# Altium PCB BLDC-Driver.PcbDoc
Units mm, origin at the board's own origin, x right, y up, seen from the top; angles counter-clockwise.
Board outline 62.48 x 53.29 mm, 2 copper layers (Top Layer, Bottom Layer), stack 0.264 mm thick; 59 components, 38 nets, 170 pads, 111 vias.
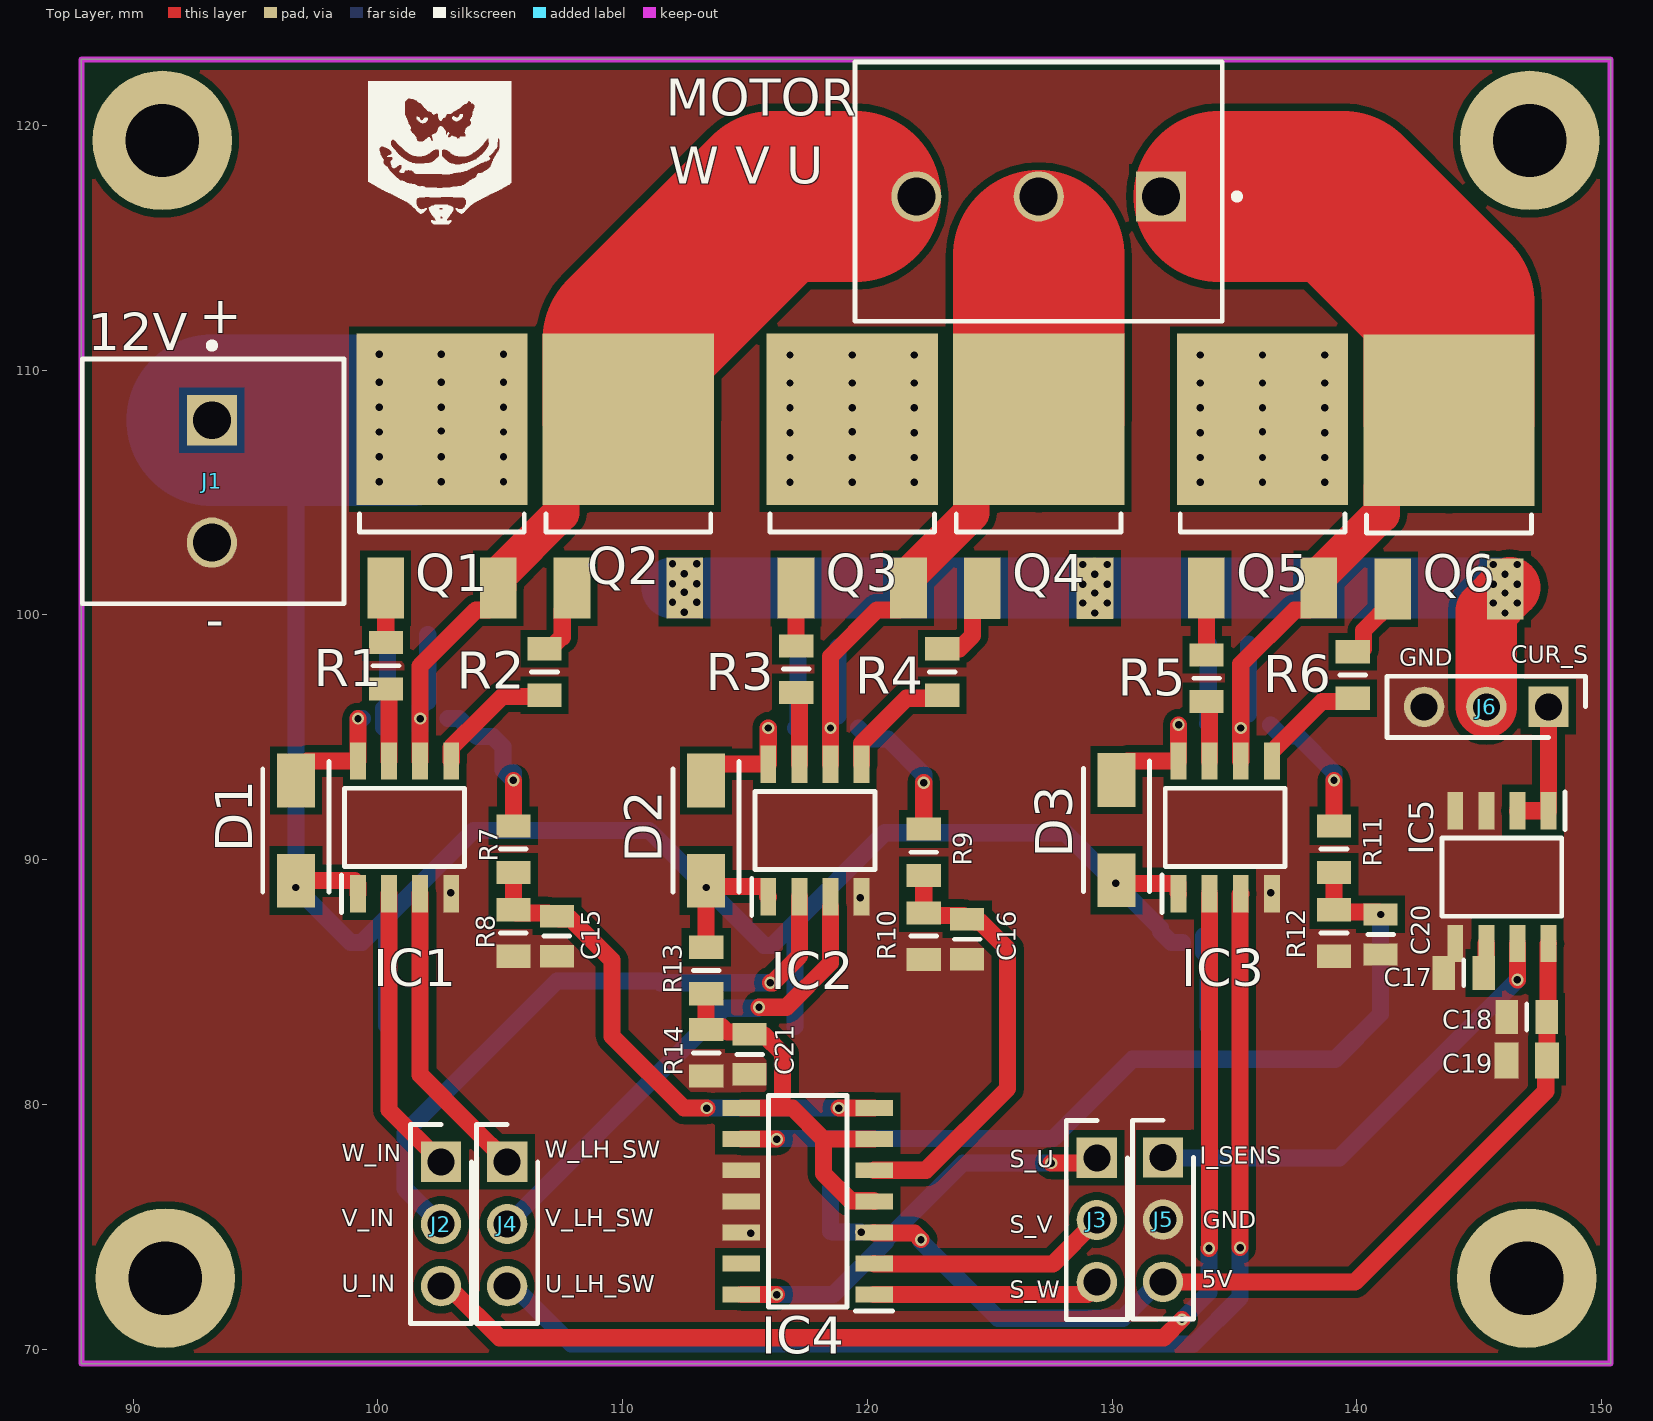
[diagram p0: Top Layer view]
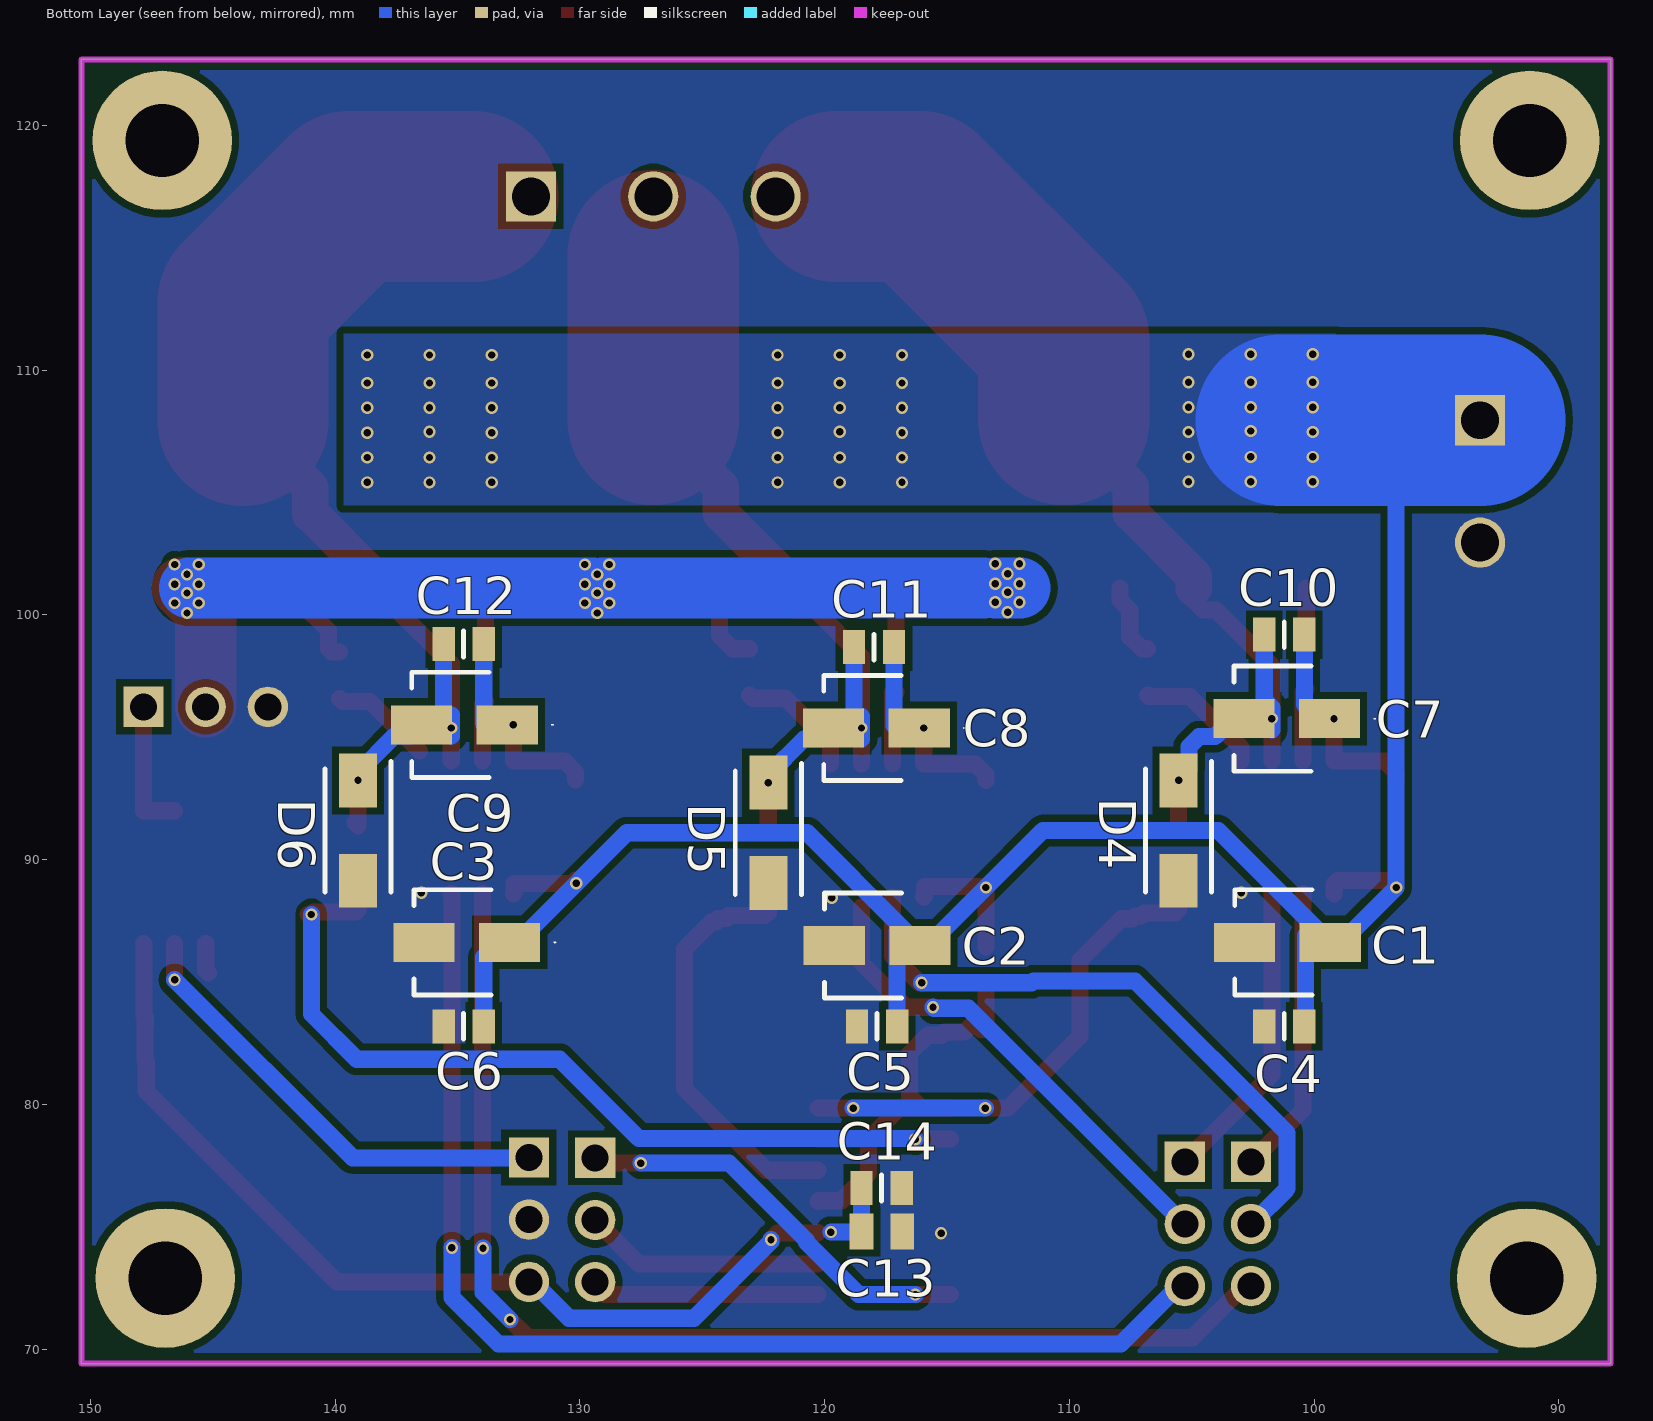
[diagram p1: Bottom Layer view, seen from below]

## Layer stack, top to bottom
Top Solder: solder mask 0.0102, Solder Resist, Dk 3.5
Top Layer: signal copper 0.0356
Dielectric 1: prepreg 0.193, FR4, Dk 4.6
Bottom Layer: signal copper 0.0356
Bottom Solder: solder mask 0.0102, Solder Resist, Dk 3.5

## Board outline
87.884,69.405 87.884,122.694 119.4,122.694 150.368,122.694 150.368,69.406

## Design rules (kind name [scope] priority, off if disabled: settings)
Clearance [All] p1: gap=0.3 ignorepadtopadclearanceinfootprint=FALSE except(0: Arc-Hole Track-Hole SMDPad-Hole THPad-Hole Via-Hole Fill-Hole Poly-Hole Region-Hole Text-Hole)
ComponentClearance ComponentClearance_1 [InComponent('J*') vs InComponent('J*')] p1: gap=0 collisioncheckmode=3 verticalgap=0 showdistances=FALSE
ComponentClearance [All] p2: gap=0.254 collisioncheckmode=3 verticalgap=0.254 showdistances=FALSE
PolygonConnect [All] p1: connectstyle=Direct reliefconductorwidth=0 reliefentries=4 polygonreliefangle="90 Angle" airgapwidth=0.254
RoutingVias [All] p1: holewidth=0.711 width=1.27 viastyle="Through Hole" minholewidth=0.3 minwidth=0.5 maxholewidth=1.5 maxwidth=2
SolderMaskExpansion [All] p1: expansion=0.05 istentingtop=FALSE
Width [All] p1: maxlimit=7 minlimit=0.7 preferedwidth=1.5
29 further rules are at their usual default settings.

## Classes and differential pairs
component class power_part: C1 C2 C3 C4 C5 C6 C7 C8 C9 C10 C11 C12 D1 D2 D3 D4 D5 D6 IC1 IC2 IC3 Q1 Q2 Q3 Q4 Q5 Q6 R1 R2 R3 R4 R5 R6
component class in_out_ports: J1 J2 J3 J4 J5 MOTOR MOTOR1
component class control: C13 C14 C15 C16 C17 C18 C19 C20 C21 IC4 IC5 J6 R7 R8 R9 R10 R11 R12 R13 R14

## Components (designator, comment, footprint, x,y, rotation, side; value= is the part's Value field where it differs from the comment)
C1 "10uF" EEE1AA220WR 101.092,86.614 r0 bottom
C2 "10uF" EEE1AA220WR 117.856,86.487 r0 bottom
C3 "10uF" EEE1AA220WR 134.62,86.614 r0 bottom
C4 "0.1u" CAPC2012X95N 101.219,83.185 r0 bottom
C5 "0.1u" CAPC2012X95N 117.856,83.185 r0 bottom
C6 "0.1u" CAPC2012X95N 134.747,83.185 r0 bottom
C7 "2.2uF" EEE1AA220WR 101.12,95.758 r0 bottom
C8 "2.2uF" EEE1AA220WR 117.884,95.377 r0 bottom
C9 "2.2uF" EEE1AA220WR 134.719,95.504 r0 bottom
C10 "0.1u" CAPC2012X95N 101.219,99.187 r180 bottom
C11 "0.1u" CAPC2012X95N 117.983,98.679 r180 bottom
C12 "0.1u" CAPC2012X95N 134.747,98.806 r180 bottom
C13 "1u" CAPC2012X145N 117.661,74.803 r0 bottom
C14 "0.1u" CAPC2012X95N 117.671,76.581 r0 bottom
C15 "470p" CAPC2012X70N 107.315,86.868 r90 top
C16 "470p" CAPC2012X70N 124.079,86.741 r90 top
C17 "1n" CAPC2012X95N 144.366,85.369 r0 top
C18 "0.1u" CAPC2012X95N 146.939,83.566 r0 top
C19 "1u" CAPC2012X145N 146.939,81.788 r0 top
C20 "470p" CAPC2012X70N 140.97,86.937 r90 top
C21 "47n" CAPC2012X70N 115.189,82.042 r90 top
D1 "GS1G" DIOM5027X244N 96.647,91.186 r270 top
D2 "GS1G" DIOM5027X244N 113.411,91.186 r270 top
D3 "GS1G" DIOM5027X244N 130.175,91.204 r270 top
D4 "GS1G" DIOM5027X244N 105.537,91.186 r270 bottom
D5 "GS1G" DIOM5027X244N 122.301,91.092 r270 bottom
D6 "GS1G" DIOM5027X244N 139.065,91.186 r270 bottom
IC1 "IR2104STRPBF" SOIC127P600X175-8N 101.092,91.313 r90 top
IC2 "IR2104STRPBF" SOIC127P600X175-8N 117.856,91.186 r90 top
IC3 "IR2104STRPBF" SOIC127P600X175-8N 134.62,91.313 r90 top
IC4 "LM339DR" SOIC127P600X175-14N 117.563,76.034 r180 top
IC5 "ACS712ELCTR-05B-T" SOIC127P600X175-8N 145.923,89.281 r270 top
J1 "DG126-02" CXKF-KF129C-2_V 93.218,107.95 r270 top
J2 "826629-3" HDRV3W63P0X254_1X3_762X250X950P 102.577,77.648 r270 top
J3 "826629-3" HDRV3W63P0X254_1X3_762X250X950P 129.374,77.812 r270 top
J4 "826629-3" HDRV3W63P0X254_1X3_762X250X950P 105.283,77.648 r270 top
J5 "826629-3" HDRV3W63P0X254_1X3_762X250X950P 132.08,77.826 r270 top
J6 "826629-3" HDRV3W63P0X254_1X3_762X250X950P 147.828,96.241 r180 top
MOTOR "SCREW-5.0/5.08 3WAYS" SCREW-5.0-3WAYS_V 127,117.094 r180 top
Q1 "IRLR2705PBF" FP-PG-TO252-3-MFG 102.616,105.664 r0 top
Q2 "IRLR2705PBF" FP-PG-TO252-3-MFG 110.233,105.667 r0 top
Q3 "IRLR2705PBF" FP-PG-TO252-3-MFG 119.38,105.664 r0 top
Q4 "IRLR2705PBF" FP-PG-TO252-3-MFG 126.998,105.661 r0 top
Q5 "IRLR2705PBF" FP-PG-TO252-3-MFG 136.146,105.666 r0 top
Q6 "IRLR2705PBF" FP-PG-TO252-3-MFG 143.764,105.625 r0 top
R1 "100" RESC2012X60N 100.33,97.917 r90 top
R2 "100" RESC2012X60N 106.807,97.663 r90 top
R3 "100" RESC2012X60N 117.094,97.78 r90 top
R4 "100" RESC2012X60N 123.063,97.663 r90 top
R5 "100" RESC2012X60N 133.858,97.409 r90 top
R6 "100" RESC2012X60N 139.827,97.536 r90 top
R7 "6.8k" RESC2012X60N 105.537,90.424 r90 top
R8 "3.9k" RESC2012X60N 105.537,86.995 r90 top
R9 "6.8k" RESC2012X60N 122.301,90.297 r90 top
R10 "3.9k" RESC2012X60N 122.301,86.868 r90 top
R11 "6.8k" RESC2012X60N 139.065,90.424 r90 top
R12 "3.9k" RESC2012X60N 139.065,86.995 r90 top
R13 "6.8k" RESC2012X60N 113.411,85.471 r90 top
R14 "1.5k" RESC2012X60N 113.411,82.103 r90 top

## Footprints (in the part's own frame and the unit in brackets; to place one, negate y for a bottom-side part, rotate by r counter-clockwise, add the part's x,y. Pads: shape width x height; smd on the part's side, far side on the other; paste and mask are expansions set on the pad)
CAPC2012X70N [mm]
  rect 0.91x1.39 smd: 1(-0.82,0) 2(0.82,0)
  silkscreen extent 0,-0.53 0,0.53, body extent -1,-0.63 1,0.63, height 0.7
CAPC2012X95N [mm]
  rect 0.91x1.39 smd: 1(-0.82,0) 2(0.82,0)
  silkscreen extent 0,-0.53 0,0.53, body extent -1,-0.63 1,0.63, height 0.95
CAPC2012X145N [mm]
  rect 0.97x1.47 smd: 1(-0.83,0) 2(0.83,0)
  body extent -1,-0.63 1,0.63, height 1.45
CXKF-KF129C-2_V [mm] "Terminal Block, Pitch 5mm, 1x2 Position, Height 19.2mm, Tail Length 3.5mm"
  rect 2.05x2.05 hole 1.55: 1(0,0)
  round 2.05 hole 1.55: 2(5,0)
  silkscreen extent -3.17,-5.3 7.5,5.4, body extent -2.5,-5.3 7.5,5.4, height 19.2
DIOM5027X244N [mm]
  rect 2.2x1.55 smd: 1(-2.05,0) 2(2.05,0)
  silkscreen extent -2.83,-1.35 2.52,1.35, body extent -2.5,-1.35 2.5,1.35, height 2.24
EEE1AA220WR [mm]
  rect 2.5x1.6 smd: 1(-1.75,0) 2(1.75,0)
  silkscreen extent -3.63,-2.15 2.15,2.15, body extent -2.5,-2.15 2.5,2.15, height 5.78
FP-PG-TO252-3-MFG [mm]
  rect 1.5x2.5 smd paste+0 mask+0: 1(-2.3,-4.575) 3(2.3,-4.575)
  rect 7x7 smd paste+0 mask+0: 4(0,2.325)
  silkscreen extent -3.36,-2.28 3.36,-1.55, body extent -3.6,-5.92 3.6,5.92, height 0.25
HDRV3W63P0X254_1X3_762X250X950P [mm]
  rect 1.65x1.65 hole 1.1: 1(0,0)
  round 1.65 hole 1.1: 2(2.54,0) 3(5.08,0)
  silkscreen extent -1.52,-1.25 6.6,1.25, body extent -1.27,-1.25 6.35,1.25, height 9.5
RESC2012X60N [mm]
  rect 0.95x1.4 smd: 1(-0.95,0) 2(0.95,0)
  silkscreen extent 0,-0.53 0,0.53, body extent -1,-0.63 1,0.63, height 0.6
SCREW-5.0-3WAYS_V [mm] "Socket, Screw Terminal Block, 3-Leads, Pitch 5mm, 90 Degree Angle, Through-Hole"
  rect 2.05x2.05 hole 1.55: 1(-5,0)
  round 2.05 hole 1.55: 2(0,0) 3(5,0)
  silkscreen extent -8.22,-5.5 7.5,5.1, body extent -7.5,-5.5 7.5,5.1, height 18.2
SOIC127P600X175-8N [mm]
  rect 1.525x0.65 smd: 1(-2.712,1.905) 2(-2.712,0.635) 3(-2.712,-0.635) 4(-2.712,-1.905) 5(2.712,-1.905) 6(2.712,-0.635) 7(2.712,0.635) 8(2.712,1.905)
  silkscreen extent -3.47,-2.45 1.6,2.58, body extent -3,-2.45 3,2.45, height 1.75
SOIC127P600X175-14N [mm]
  rect 1.525x0.65 smd: 1(-2.712,3.81) 2(-2.712,2.54) 3(-2.712,1.27) 4(-2.712,0) 5(-2.712,-1.27) 6(-2.712,-2.54) 7(-2.712,-3.81) 8(2.712,-3.81) 9(2.712,-2.54) 10(2.712,-1.27) 11(2.712,0) 12(2.712,1.27) 13(2.712,2.54) 14(2.712,3.81)
  silkscreen extent -3.47,-4.33 1.6,4.48, body extent -3,-4.33 3,4.33, height 1.75

## Part data
C1 C2 C3: library part EEE-FK1E100R, "Capacitor Polarised", Manufacturer_Name=Panasonic, Mouser Part Number=667-EEE-FK1E100R, Arrow Part Number=EEE-FK1E100R, Arrow Price/Stock=https://www.arrow.com/en/products/eeefk1e100r/panasonic?region=nac, Datasheet Link=http://industrial.panasonic.com/cdbs/www-data/pdf/RDE0000/ABA0000C1181.pdf, Height=5.5mm, Manufacturer_Part_Number=EEE-FK1E100R, Mouser Price/Stock=https://www.mouser.co.uk/ProductDetail/Panasonic/EEE-FK1E100R?qs=qE6bgDGEOCuIB5AxqKF88Q%3D%3D
C4 C5 C6 C10 C11 C12 C14 C17 C18: library part GRM219F51H104ZA01B, "Capacitor", Manufacturer_Name="Murata Electronics", Mouser Part Number=81-GRM21F51H104ZA01B, Datasheet Link=http://www.murata.com/~/media/webrenewal/support/library/catalog/products/capacitor/mlcc/c02e.pdf, Height=0.95mm, Manufacturer_Part_Number=GRM219F51H104ZA01B, Mouser Price/Stock=https://www.mouser.co.uk/ProductDetail/Murata-Electronics/GRM219F51H104ZA01B?qs=A13M%252BoT%252Bkzo6MjTOB8REcg%3D%3D
C7 C8 C9: library part EEE-HB1H2R2AR, "Capacitor Polarised", Manufacturer_Name=Panasonic, Mouser Part Number=667-EEE-HB1H2R2AR, Arrow Part Number=EEE-HB1H2R2AR, Arrow Price/Stock=https://www.arrow.com/en/products/eee-hb1h2r2ar/panasonic, Datasheet Link=http://industrial.panasonic.com/cdbs/www-data/pdf/RDE0000/ABA0000C1154.pdf, Height=5.5mm, Manufacturer_Part_Number=EEE-HB1H2R2AR, Mouser Price/Stock=https://www.mouser.co.uk/ProductDetail/Panasonic/EEE-HB1H2R2AR?qs=d1CqaRUMZD8bJW987Ww1zg%3D%3D
C13 C19: library part GRM21BR71C105KA01K, "Capacitor", Manufacturer_Name="Murata Electronics", Mouser Part Number=81-GRM40X105K16K, Arrow Part Number=GRM21BR71C105KA01K, Arrow Price/Stock=https://www.arrow.com/en/products/grm21br71c105ka01k/murata-manufacturing?region=nac, Datasheet Link=http://www.murata.com/~/media/webrenewal/support/library/catalog/products/capacitor/mlcc/c02e.pdf, Height=1.45mm, Manufacturer_Part_Number=GRM21BR71C105KA01K, Mouser Price/Stock=https://www.mouser.co.uk/ProductDetail/Murata-Electronics/GRM21BR71C105KA01K?qs=WNiIrCCjU2S8h%252B9o4PZIpA%3D%3D
C15 C16 C20 C21: library part GRM2165C1H471JA01D, "Capacitor", Manufacturer_Name="Murata Electronics", Mouser Part Number=81-GRM215C1H471JA01D, Arrow Part Number=GRM2165C1H471JA01D, Arrow Price/Stock=https://www.arrow.com/en/products/grm2165c1h471ja01d/murata-manufacturing?region=nac, Datasheet Link=http://www.murata.com/~/media/webrenewal/support/library/catalog/products/capacitor/mlcc/c02e.pdf, Height=0.7mm, Manufacturer_Part_Number=GRM2165C1H471JA01D, Mouser Price/Stock=https://www.mouser.co.uk/ProductDetail/Murata-Electronics/GRM2165C1H471JA01D?qs=kEQ31%252BHm99mGVasPXslxeg%3D%3D
D1 D2 D3 D4 D5 D6: "Diode", Manufacturer_Name="PANJIT International Inc", Datasheet Link=https://www.panjit.com.tw/en/Product/downloadPDF/GS1G, Height=2.44mm, Manufacturer_Part_Number=GS1G
IC1 IC2 IC3: "Integrated Circuit", Manufacturer_Name=Infineon, Mouser Part Number=942-IR2104STRPBF, Arrow Part Number=IR2104STRPBF, Arrow Price/Stock=https://www.arrow.com/en/products/ir2104strpbf/infineon-technologies-ag?region=nac, Datasheet Link=https://www.infineon.com/cms/en/product/power/gate-driver-ics/?, Height=1.75mm, Manufacturer_Part_Number=IR2104STRPBF, Mouser Price/Stock=https://www.mouser.co.uk/ProductDetail/Infineon-Technologies/IR2104STRPBF?qs=2r01AXMCG3NCbspWVHqTYw%3D%3D
IC4: "Integrated Circuit", Manufacturer_Name="Texas Instruments", Mouser Part Number=595-LM339DR, Arrow Part Number=LM339DR, Arrow Price/Stock=https://www.arrow.com/en/products/lm339dr/texas-instruments?region=nac, Datasheet Link=http://www.ti.com/lit/gpn/lm339, Height=1.75mm, Manufacturer_Part_Number=LM339DR, Mouser Price/Stock=https://www.mouser.co.uk/ProductDetail/Texas-Instruments/LM339DR?qs=vxEfx8VrU7Aps9Hd52ppTA%3D%3D
IC5: "Integrated Circuit", Manufacturer_Name="Allegro Microsystems", Mouser Part Number=250-712ELCTR05BT, Arrow Part Number=ACS712ELCTR-05B-T, Arrow Price/Stock=https://www.arrow.com/en/products/acs712elctr-05b-t/allegro-microsystems?region=europe, Datasheet Link=https://www.allegromicro.com/~/media/Files/Datasheets/ACS712-Datasheet.ashx, Height=1.75mm, Manufacturer_Part_Number=ACS712ELCTR-05B-T, Mouser Price/Stock=https://www.mouser.co.uk/ProductDetail/Allegro-MicroSystems/ACS712ELCTR-05B-T?qs=pUKx8fyJudDs65Rkshv5ug%3D%3D
J1: library part CMP-0813-00004-1, "Euro Terminal Block, 20 A, 300 V, -40 to 105 degC, Pitch 5 mm, 1 x 2 Position, Height 19.2 mm, Tail Length 3.5 mm", Color=Green, Contact Resistance="20 mOhm", Insulation Resistance="5000 MOhm / 1000 V", Manufacturer="Cixi KaiFeng", PartNumber=KF129C-02P-14, Rated Current="20 A", Rated Voltage="300 V", Temp. Range="-40 to 105 degC", Withstanding Voltage="AC 1500 V / 1 Min", ComponentLink1Description="Manufacturer URL", ComponentLink1URL=http://www.nb-kaifeng.com/, ComponentLink2Description=Datasheet, ComponentLink2URL=http://www.nb-kaifeng.com/upload/editor/ext_pdf/201208170644598657.pdf, Contact=Brass, Mounting Technology="Through Hole", No. of Pole=2, PackageDescription="Terminal Block, Pitch 5 mm, 1 x 2 Position, Height 19.2 mm, Tail Length 3.5 mm", PackageReference=KF129C-2, Pitch="Single Pitch"
J2 J3 J4 J5 J6: "Connector", Manufacturer_Name="TE Connectivity", Mouser Part Number=571-826629-3, Arrow Part Number=826629-3, Arrow Price/Stock=https://www.arrow.com/en/products/826629-3/te-connectivity?region=europe, Datasheet Link=http://www.te.com/commerce/DocumentDelivery/DDEController?Action=showdoc&DocId=Customer+Drawing%7F826629%7FAA%7Fpdf%7FEnglish%7FENG_CD_826629_AA_baseFilename.pdf%7F826629-3.pdf, Height=9.5mm, Manufacturer_Part_Number=826629-3, Mouser Price/Stock=https://www.mouser.co.uk/ProductDetail/TE-Connectivity/826629-3?qs=AplfTeSvkkA3hKOe%252BWTzDA%3D%3D
MOTOR: library part CMP-0617-00010-1, "Socket, Screw Terminal Block, 3 Way, 5.0 mm Pitch, 90 Degree Angle, Through-Hole", Contact Resistance="20 mOhm", Insulation Resistance="5000 MOhm / 1000 V", Manufacturer="No Vendor", Rated Current="25 A", Rated Voltage="300 V", Temperature Range="-40 to 105 degC", ComponentLink1Description=Datasheet, ComponentLink1URL="5mm screw terminal in SVN", Mounting Technology="Through Hole", PackageDescription="Socket, Screw Terminal Block, 3 Way, Pitch 5 mm, 90 Degree Angle, Through-Hole", PartNumber="SCREW-5.0/5.08 3WAYS", Poles=3
Q1 Q2 Q3 Q4 Q5 Q6: library part CMP-32901-000108-1, "MOSFET N-CH 55V 44A DPAK", Continuous Drain Current=44A, Drain To Source Breakdown Voltage=55V, Drain To Source Resistance=0.027Ω, Gate To Source Voltage=20V, Input Capacitace At Vds="1300pF @ 25V", Manufacturer=Infineon, Manufacturer Part Number=IRFR1205TRPBF, Max Forward Diode Voltage=1.3V, Max Junction Temp=+175°C, Package=PG-TO252-3, Power Dissipation=107W, Pulse Drain Current=160A, Temperature="-55°C to +175°C", Temperature Range Low=-55°C, Automotive=No, Category=Trans, ComponentLink2Description=Datasheet, ComponentLink2URL=https://www.infineon.com/dgdl/irfr1205pbf.pdf?fileId=5546d462533600a40153562d17792047, Depletion Mode=False, Device Class L1="Discrete Semiconductors", Device Class L2=Transistors, Device Class L3=MOSFETs, Digikey Description="MOSFET N-CH 55V 44A DPAK", Drain To Source Voltage=55V, Footprint Url=https://www.infineon.com/cms/en/product/packages/PG-TO252/PG-TO252-3-901/, Gate Charge At Vgs="65nC @ 10V", Height=2.52mm, Lead Free=Yes, Number of Channels=1, Number Of N Channels=1, Octopart=https://octopart.com/irfr1205trpbf-infineon-65874068, Reverse Recovery Charge=160nC, Reverse Recovery Time=65ns, RoHS=TRUE, Rthja Max=50°C/W, Temperature Range High=+175°C, Threshold Vgs Max=4V, Threshold Vgs Min=2V, Transconductance=17S, Turn Off Delay Time=47ns, Turn On Delay Time=7.3ns
R1 R2 R3 R4 R5 R6: library part RC0805JR-0720RL, "Resistor", Manufacturer_Name=KEMET, Mouser Part Number=603-RC0805JR-0720RL, Arrow Part Number=RC0805JR-0720RL, Arrow Price/Stock=https://www.arrow.com/en/products/rc0805jr-0720rl/yageo, Datasheet Link=http://www.yageo.com/documents/recent/PYu-RC_Group_51_RoHS_L_10.pdf, Height=0.6mm, Manufacturer_Part_Number=RC0805JR-0720RL, Mouser Price/Stock=https://www.mouser.com/Search/Refine.aspx?Keyword=603-RC0805JR-0720RL
R7 R9 R11 R13: library part RC0805FR-076K8L, "Resistor", Manufacturer_Name=KEMET, Mouser Part Number=603-RC0805FR-076K8L, Arrow Part Number=RC0805FR-076K8L, Arrow Price/Stock=https://www.arrow.com/en/products/rc0805fr-076k8l/yageo, Datasheet Link=http://www.yageo.com/documents/recent/PYu-RC_Group_51_RoHS_L_10.pdf, Height=0.6mm, Manufacturer_Part_Number=RC0805FR-076K8L, Mouser Price/Stock=https://www.mouser.com/Search/Refine.aspx?Keyword=603-RC0805FR-076K8L
R8 R10 R12: library part RC0805FR-073K9L, "Resistor", Manufacturer_Name=KEMET, Mouser Part Number=603-RC0805FR-073K9L, Datasheet Link=http://www.yageo.com/documents/recent/PYu-RC_Group_51_RoHS_L_10.pdf, Height=0.6mm, Manufacturer_Part_Number=RC0805FR-073K9L, Mouser Price/Stock=https://www.mouser.com/Search/Refine.aspx?Keyword=603-RC0805FR-073K9L
R14: library part RC0805FR-071K5L, "Resistor", Manufacturer_Name=YAGEO, Mouser Part Number=603-RC0805FR-071K5L, Arrow Part Number=RC0805FR-071K5L, Arrow Price/Stock=https://www.arrow.com/en/products/rc0805fr-071k5l/yageo?region=nac, Datasheet Link=https://br.mouser.com/datasheet/2/447/YAGEO_PYu_RC_Group_51_RoHS_L_12-3313492.pdf, Height=0.6mm, Manufacturer_Part_Number=RC0805FR-071K5L, Mouser Price/Stock=https://www.mouser.co.uk/ProductDetail/YAGEO/RC0805FR-071K5L?qs=8Y8p%252BasKcI6LbaohOVk4HA%3D%3D

## Free pads (board coordinates)
  round 5.7 hole 3: 3(91.186,119.38) 3(91.313,72.898) 3(146.939,72.898) 3(147.066,119.38)

## Via types
v1: diameter 0.5, hole 0.3, Top Layer to Bottom Layer, tented both sides, 111 vias

## Nets (pads, with @x,y where several pads share a name; then routed paths per layer and width w, separated by ;. In a path a pad name is that pad's centre, name@x,y a point inside that pad or via, vN(x,y) a via of type N, cw(c..) or ccw(c..) an arc to the next point about the centre after c; other vN are vias at no path point)
5V: C13.2 C14.2 C18.2 C19.2 IC4.3 IC5.8 J5.3 | length 41.8
  Top Layer w0.7: IC4.3 120.3,74.739 121.923,74.739 v1(122.193,74.469) ; J5.3 132.094,72.732 139.915,72.732 147.718,80.535 147.718,81.737 C19.2 147.764,81.793 147.764,83.221 147.759,83.226 C18.2 147.803,83.61 147.803,86.544 IC5.8
  Bottom Layer w0.7: C13.2 C14.2 ; C13.2@118.567,74.778 v1(119.744,74.778) ; v1(122.193,74.469) 122.193,74.398 125.334,71.257 130.439,71.257 131.928,72.746 J5.3
12V: C1.1 C2.1 C3.1 C4.1 C5.1 C6.1 D1.2 D2.2 D3.2 IC1.1 IC2.1 IC3.1 J1.1 Q1.4 Q3.4 Q5.4 R13.2 | length 95.2
  Top Layer w0.7: D1.2 99.039,89.136 99.187,88.988 IC1.1 ; R13.2 D2.2@113.411,88.899 ; v1(113.411,88.859) D2.2@113.411,88.899 ; IC2.1 115.926,88.499 115.926,88.886 115.913,88.899 D2.2@113.411,88.899 ; v1(130.15,89.027) 130.175,89.052 D3.2 ; D3.2@130.175,89.026 132.677,89.026 132.69,89.013 132.69,88.626 IC3.1
  Bottom Layer w0.7: 97.108,107.95 96.647,107.489 v1(96.647,88.859) 98.892,86.614 C1.1 103.914,91.186 111.084,91.186 v1(113.411,88.859) 115.783,86.487 C2.1 116.867,87.248 120.711,91.092 128.085,91.092 131.97,87.207 131.97,87.064 132.42,86.614 C3.1 ; C1.1@100.355,86.893 100.355,83.229 C4.1 ; C2.1@117.018,87.097 117.036,87.078 C5.1 ; C3.1@133.731,86.868 133.731,86.203 133.927,86.007 C6.1
  Bottom Layer w7: J1.1 97.108,107.95 101.346,107.95
  other v1: 116.84,105.41 119.38,105.41 121.92,105.41 133.604,105.41 136.144,105.41 138.684,105.41 100.051,105.435 102.591,105.435 105.131,105.435 116.84,106.426 119.38,106.426 121.92,106.426 133.604,106.426 136.144,106.426 138.684,106.426 100.051,106.451 102.591,106.451 105.131,106.451 116.84,107.442 121.92,107.442 133.604,107.442 138.684,107.442 100.051,107.467 105.131,107.467 119.38,107.481 136.144,107.481 102.591,107.506 116.84,108.458 119.38,108.458 121.92,108.458 133.604,108.458 136.144,108.458 138.684,108.458 100.051,108.483 102.591,108.483 105.131,108.483 116.84,109.474 119.38,109.474 121.92,109.474 133.604,109.474 136.144,109.474 138.684,109.474 100.051,109.499 102.591,109.499 105.131,109.499 116.84,110.617 119.38,110.617 121.92,110.617 133.604,110.617 136.144,110.617 138.684,110.617 100.051,110.642 102.591,110.642 105.131,110.642
GND: C1.2 C2.2 C3.2 C4.2 C5.2 C6.2 C13.1 C14.1 C15.1 C16.1 C17.1 C18.1 C19.1 C20.1 C21.1 D4.2 D5.2 D6.2 IC1.4 IC2.4 IC3.4 IC4.10 IC4.11 IC4.12 IC5.3 IC5.4 IC5.5 J1.2 J5.2 J6.3 R8.1 R10.1 R12.1 R14.1
  other v1: 115.24,74.727 119.71,88.443 102.972,88.646 136.474,88.646
I_SENS: IC5.7 J5.1 | length 19
  Top Layer w0.7: v1(146.558,85.09) IC5.7
  Bottom Layer w0.7: J5.1 132.094,77.812 139.28,77.812 v1(146.558,85.09)
NetC7_1: C7.1 C10.2 D1.1 IC1.8 | length 8.8
  Top Layer w0.7: D1.1 96.647,93.561 97.111,94.025 IC1.8 v1(99.187,95.758)
  Bottom Layer w0.7: v1(99.187,95.758) C7.1 ; C7.1@100.228,95.402 100.228,96.166 100.399,96.337 C10.2
NetC8_1: C8.1 C11.2 D2.1 IC2.8 | length 7.8
  Top Layer w0.7: D2.1 113.411,93.473 113.836,93.898 IC2.8 v1(115.951,95.377)
  Bottom Layer w0.7: C8.1@117.069,95.377 117.163,95.471 C11.2
NetC9_1: C9.1 C12.2 D3.1 IC3.8 | length 7.8
  Top Layer w0.7: D3.1 130.175,93.579 130.621,94.025 IC3.8 v1(132.715,95.504)
  Bottom Layer w0.7: C9.1@133.909,95.555 133.927,95.573 C12.2
NetC17_2: C17.2 IC5.6 | length 1.2
  Top Layer w0.7: C17.2 145.288,85.471 IC5.6
NetIC1_5: IC1.5 R2.1 | length 5.3
  Top Layer w0.7: IC1.5 102.997,94.583 104.394,95.98 105.079,96.665 106.759,96.665 R2.1
NetIC1_7: IC1.7 R1.1 | length 3
  Top Layer w0.7: R1.1 100.332,96.967 100.457,96.842 IC1.7
NetIC2_5: IC2.5 R4.1 | length 5
  Top Layer w0.7: IC2.5 119.761,94.748 121.601,96.588 122.938,96.588 R4.1
NetIC2_7: IC2.7 R3.1 | length 3.1
  Top Layer w0.7: R3.1 117.221,96.83 117.221,94.025 IC2.7
NetIC3_5: IC3.5 R6.1 | length 4.2
  Top Layer w0.7: IC3.5@136.55,94.437 138.574,96.461 139.702,96.461 R6.1
NetIC3_7: IC3.7 R5.1 | length 2.5
  Top Layer w0.7: R5.1 133.86,96.459 133.985,96.334 IC3.7
NetIC5_1: IC5.1 IC5.2 J6.1 | length 5.5
  Top Layer w0.7: IC5.2 IC5.1 J6.1
NetQ1_1: Q1.1 R1.2 | length 2.2
  Top Layer w0.7: Q1.1 100.323,101.082 100.323,98.874 R1.2
NetQ2_1: Q2.1 R2.2 | length 3.1
  Top Layer w0.7: R2.2 107.032,98.613 107.501,99.082 107.533,99.082 107.533,100.192 107.933,100.592 Q2.1
NetQ3_1: Q3.1 R3.2 | length 2.4
  Top Layer w0.7: Q3.1 117.087,101.082 117.087,98.737 R3.2
NetQ4_1: Q4.1 R4.2 | length 3.6
  Top Layer w0.7: R4.2 123.065,98.611 123.761,98.611 124.298,99.148 124.298,100.686 Q4.1
NetQ5_1: Q5.1 R5.2 | length 2.7
  Top Layer w0.7: Q5.1 133.852,101.085 133.852,98.365 R5.2
NetQ6_1: Q6.1 R6.2 | length 3.4
  Top Layer w0.7: R6.2 139.954,98.486 140.143,98.486 140.268,98.611 140.268,99.354 141.464,100.55 Q6.1
S_U: IC4.14 J3.1 | length 16.9
  Top Layer w0.7: IC4.14 v1(116.293,72.224) ; v1(127.508,77.597) 129.159,77.597 J3.1
  Bottom Layer w0.7: v1(116.293,72.224) 118.604,72.224 120.744,74.363 120.744,74.434 123.906,77.597 v1(127.508,77.597)
S_V: IC4.2 J3.2 | length 9.9
  Top Layer w0.7: IC4.2 120.3,73.469 127.571,73.469 J3.2
S_W: IC4.1 J3.3 | length 9.4
  Top Layer w0.7: IC4.1 128.99,72.224 129.374,72.608 J3.3
SHUNT: J6.2 Q2.3 Q4.3 Q6.3 | length 38.3
  Top Layer w2.5: J6.2 145.288,100.152 Q6.3@146.253,101.117
  Bottom Layer w2.5: v1@112.014,101.092 v1@113.03,101.092 ; 113.513,101.092 129.083,101.092 ; 129.489,101.092 v1@145.948,101.092
  other v1: 129.286,100.076 146.05,100.076 112.522,100.101 128.803,100.482 129.794,100.482 145.567,100.482 146.558,100.482 112.039,100.508 113.03,100.508 129.286,100.889 146.05,100.889 112.522,100.914 128.803,101.244 129.794,101.244 145.567,101.244 146.558,101.244 112.039,101.27 113.03,101.27 129.286,101.651 146.05,101.651 112.522,101.676 128.803,102.057 129.794,102.057 145.567,102.057 146.558,102.057 112.039,102.083 113.03,102.083
U: C9.2 C12.1 D6.1 IC3.6 MOTOR.1 Q5.3 Q6.4 R11.2 | length 43.2
  Top Layer w0.7: IC3.6 v1(135.255,95.377) 135.255,97.989 137.457,100.191 138.046,100.191 138.446,100.591 Q5.3 ; v1(139.065,93.236) R11.2 139.067,91.374 R11.2@139.192,91.499
  Top Layer w1.5: Q5.3 138.446,101.591 140.976,104.12 141.014,104.12 141.014,105.2 Q6.4
  Top Layer w7: 134.366,117.094 139.417,117.094 143.764,112.747 Q6.4
  Bottom Layer w0.7: C9.2@135.255,95.051 v1(135.255,95.377) ; C9.2@135.255,95.504 C9.2@135.255,95.91 ; C9.2@135.567,95.956 C12.1 ; C9.2 136.919,95.054 137.572,95.054 139.065,93.561 v1(139.065,93.236)
U_IN: IC3.2 J2.3 | length 49.4
  Top Layer w0.7: J2.3 102.577,72.404 102.616,72.365 103.071,72.365 104.974,70.462 132.111,70.462 v1(132.856,71.207) ; v1(133.96,74.117) 133.985,74.143 IC3.2
  Bottom Layer w0.7: v1(132.856,71.207) 133.96,72.311 v1(133.96,74.117)
U_LH_SW: IC3.3 J4.3 | length 48.2
  Top Layer w0.7: v1(135.23,74.143) 135.23,87.948 135.23,88.576 IC3.3
  Bottom Layer w0.7: J4.3 105.54,72.568 107.901,70.207 133.326,70.207 135.23,72.111 v1(135.23,74.143)
V: C8.2 C11.1 D5.1 IC2.6 MOTOR.2 Q3.3 Q4.4 R9.2 | length 33.7
  Top Layer w0.7: IC2.6 v1(118.491,95.377) 118.491,98.298 120.396,100.203 121.28,100.203 121.68,100.603 Q3.3 ; R9.2 v1(122.301,93.142)
  Top Layer w1.5: Q3.3@121.68,101.589 124.248,104.157 124.248,105.236 Q4.4
  Top Layer w7: Q4.4 127,107.989 127,114.681
  Bottom Layer w0.7: C8.2@118.491,94.92 v1(118.491,95.377) C8.2@118.491,95.834 ; C8.2@118.803,95.86 C11.1 ; C8.2 120.084,94.927 120.841,94.927 122.301,93.467 v1(122.301,93.142)
V_IN: IC2.2 J2.2 | length 25.9
  Top Layer w0.7: v1(116.036,84.967) 116.135,84.967 117.221,86.053 IC2.2
  Bottom Layer w0.7: J2.2 102.548,75.108 101.102,76.554 101.102,78.826 107.317,85.041 111.47,85.041 111.544,84.967 v1(116.036,84.967)
V_LH_SW: IC2.3 J4.2 | length 19.9
  Top Layer w0.7: v1(115.57,83.967) 116.682,83.967 118.491,85.776 IC2.3@118.491,88.062
  Bottom Layer w0.7: J4.2 105.312,75.108 114.126,83.922 115.525,83.922 v1(115.57,83.967)
V_M: C21.2 IC4.4 IC4.6 IC4.8 R13.1 R14.2 | length 17.4
  Top Layer w0.7: R14.2 113.636,83.053 113.761,83.178 113.84,83.178 113.844,83.182 114.049,83.182 114.284,82.947 115.104,82.947 C21.2@115.231,82.82 ; R14.2@113.411,83.18 R13.1 ; IC4.8 116.055,79.844 ; C21.2 C21.2@115.231,82.82 ; IC4.4 120.25,76.059 119.316,76.059 118.211,77.165 118.211,78.574 ; IC4.6 118.211,78.574 ; C21.2@115.231,82.82 115.787,82.82 116.534,82.073 116.534,80.323 116.055,79.844 ; 116.055,79.844 116.941,79.844 118.211,78.574
V_U: C20.2 IC4.9 R11.1 R12.2 | length 36
  Top Layer w0.7: IC4.9 v1(116.293,78.574) ; R11.1@139.003,89.412 R11.1 R12.2 139.159,87.851 140.876,87.851 v1(140.97,87.757) C20.2@141.097,87.757
  Bottom Layer w0.7: v1(116.293,78.574) 116.316,78.597 127.59,78.597 130.833,81.84 139.117,81.84 140.97,83.693 v1(140.97,87.757)
V_V: C16.2 IC4.5 R9.1 R10.2 | length 18
  Top Layer w0.7: IC4.5 122.389,77.304 125.73,80.645 125.73,86.339 124.613,87.456 124.424,87.456 124.374,87.506 124.374,87.589 C16.2@123.993,87.589 ; R10.2 R9.1 ; R10.2@122.364,87.818 122.463,87.72 123.927,87.72 C16.2@123.952,87.695 ; C16.2@123.929,87.651 C16.2@123.929,87.666
V_W: C15.2 IC4.7 R7.1 R8.2 | length 21.4
  Top Layer w0.7: R7.1 R8.2 105.662,87.82 106.943,87.82 107.075,87.688 C15.2 107.42,87.583 107.87,87.583 109.565,85.888 109.565,82.782 112.503,79.844 v1(113.439,79.844) ; v1(118.833,79.844) IC4.7
  Bottom Layer w0.7: v1(113.439,79.844) v1(118.833,79.844)
W: C7.2 C10.1 D4.1 IC1.6 MOTOR.3 Q1.3 Q2.4 R7.2 | length 43.2
  Top Layer w0.7: IC1.6 v1(101.727,95.758) 101.727,97.913 104.003,100.189 104.516,100.189 104.916,100.589 Q1.3 ; R7.2 v1(105.537,93.236)
  Top Layer w1.5: Q1.3 104.916,101.589 107.486,104.159 107.486,105.245 Q2.4
  Top Layer w7: Q2.4 110.233,111.216 116.111,117.094 119.507,117.094
  Bottom Layer w0.7: C7.2@101.727,95.301 v1(101.727,95.758) 101.727,96.215 C7.2@101.981,96.469 ; C7.2@102.039,96.469 C10.1 ; C7.2 103.32,95.758 104.057,95.021 104.702,95.021 105.112,94.611 105.112,93.661 v1(105.537,93.236) D4.1@105.537,93.561
W_IN: IC1.2 J2.1 | length 11.8
  Top Layer w0.7: IC1.2 100.457,79.768 J2.1
W_LH_SW: IC1.3 J4.1 | length 12.4
  Top Layer w0.7: IC1.3 101.727,81.202 103.816,79.113 103.818,79.113 J4.1
pads on no net: IC4.13

## Polygon pours and split planes (outlines as drawn)
GND on Bottom Layer "GND_L02_P005" (solid, remove dead copper, pour order 5): 87.884,122.682 150.368,122.682 150.495,122.555 150.495,69.215 88.011,69.215 87.884,69.342
12V on Bottom Layer "12V_L02_P003" (solid, remove dead copper, pour order 3): 99.111,104.496 99.136,104.47 139.649,104.47 139.649,111.481 99.097,111.481 99.111,111.481
12V on Bottom Layer "12V_L02_P000" (solid, remove dead copper, pour order 0): 99.111,104.47 139.649,104.47 139.649,111.481 99.111,111.481
GND on Top Layer "GND_L01_P004" (solid, remove dead copper, pour order 4): 87.884,122.809 88.011,122.682 150.368,122.682 150.368,69.469 87.757,69.469

## Keep-outs
Keep-Out Layer:
  lines w0.254: 87.884,69.405 150.368,69.406 150.368,122.694 149.582,122.694 119.4,122.694 87.884,122.694 87.884,69.405

## Silkscreen, mask and mechanical layers (free items; w line width, h text height)
Top Overlay:
  drawing of 4 lines, arcs and shapes, not listed
  text "W V U" at 111.887,117.602 h1.52
  text "+" at 92.71,111.506 h1.52
  text "12V" at 88.138,110.804 h1.52
  text "-" at 92.964,99.06 h1.52
  text "CUR_S" at 146.304,98.034 h0.7
  text "GND" at 141.732,97.917 h0.7
  text "W_LH_SW" at 106.807,77.815 h0.7
  text "W_IN" at 98.513,77.675 h0.7
  text "I_SENS" at 133.579,77.561 h0.7
  text "S_U" at 125.818,77.421 h0.7
  text "V_LH_SW" at 106.832,75.021 h0.7
  text "V_IN" at 98.513,75.008 h0.7
  text "GND" at 133.706,74.93 h0.7
  text "S_V" at 125.818,74.754 h0.7
  text "5V" at 133.655,72.517 h0.7
  text "U_IN" at 98.513,72.341 h0.7
  text "U_LH_SW" at 106.832,72.329 h0.7
  text "S_W" at 125.818,72.087 h0.7